# Altium PCB station_de_charge_PCB1.PcbDoc
Units mm, origin at the board's own origin, x right, y up, seen from the top; angles counter-clockwise.
Board outline 56 x 64 mm, 2 copper layers (Top Layer, Bottom Layer); 39 components, 21 nets, 89 pads, 13 vias.
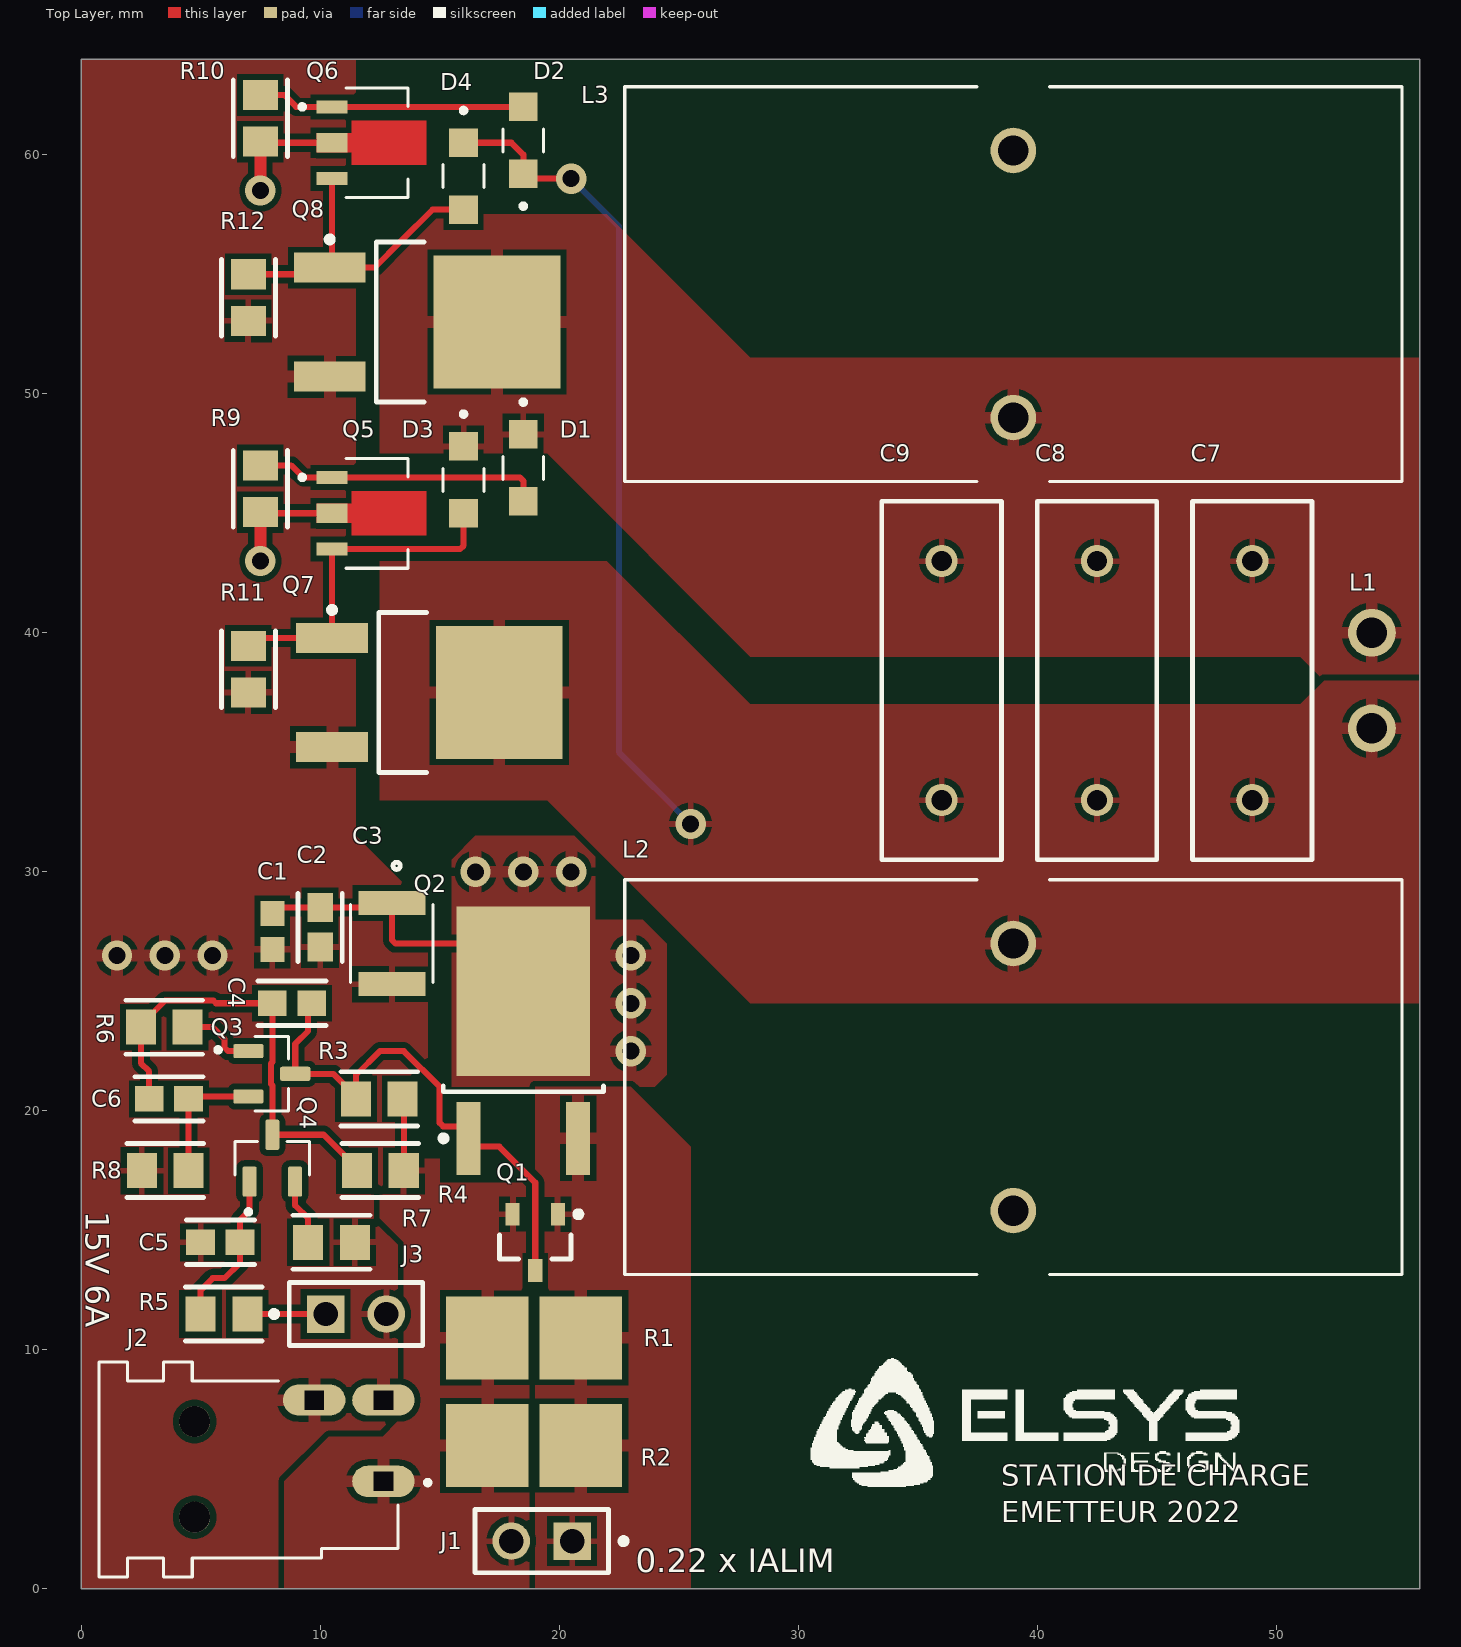
[diagram p0: Top Layer view]
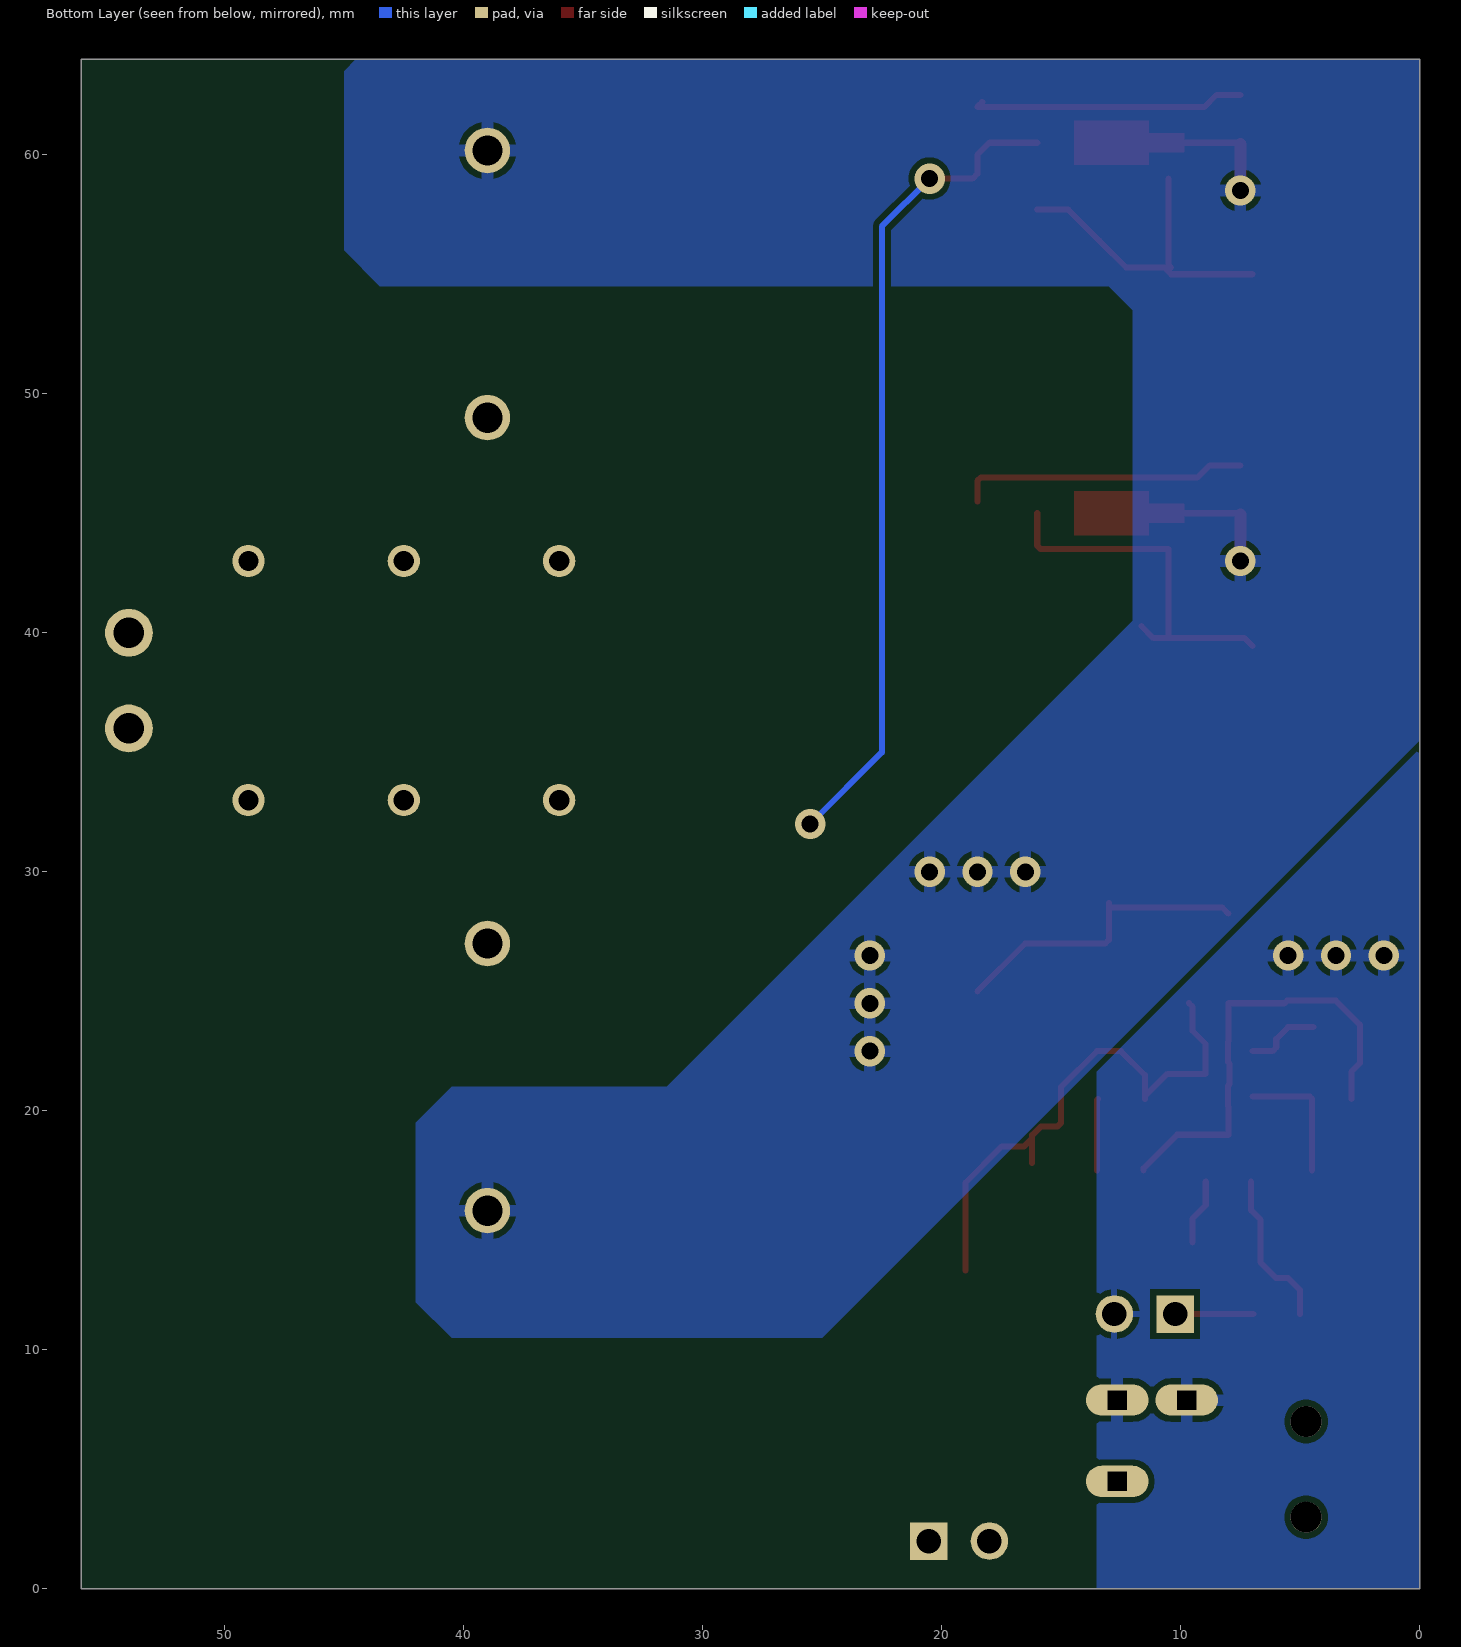
[diagram p1: Bottom Layer view, seen from below]
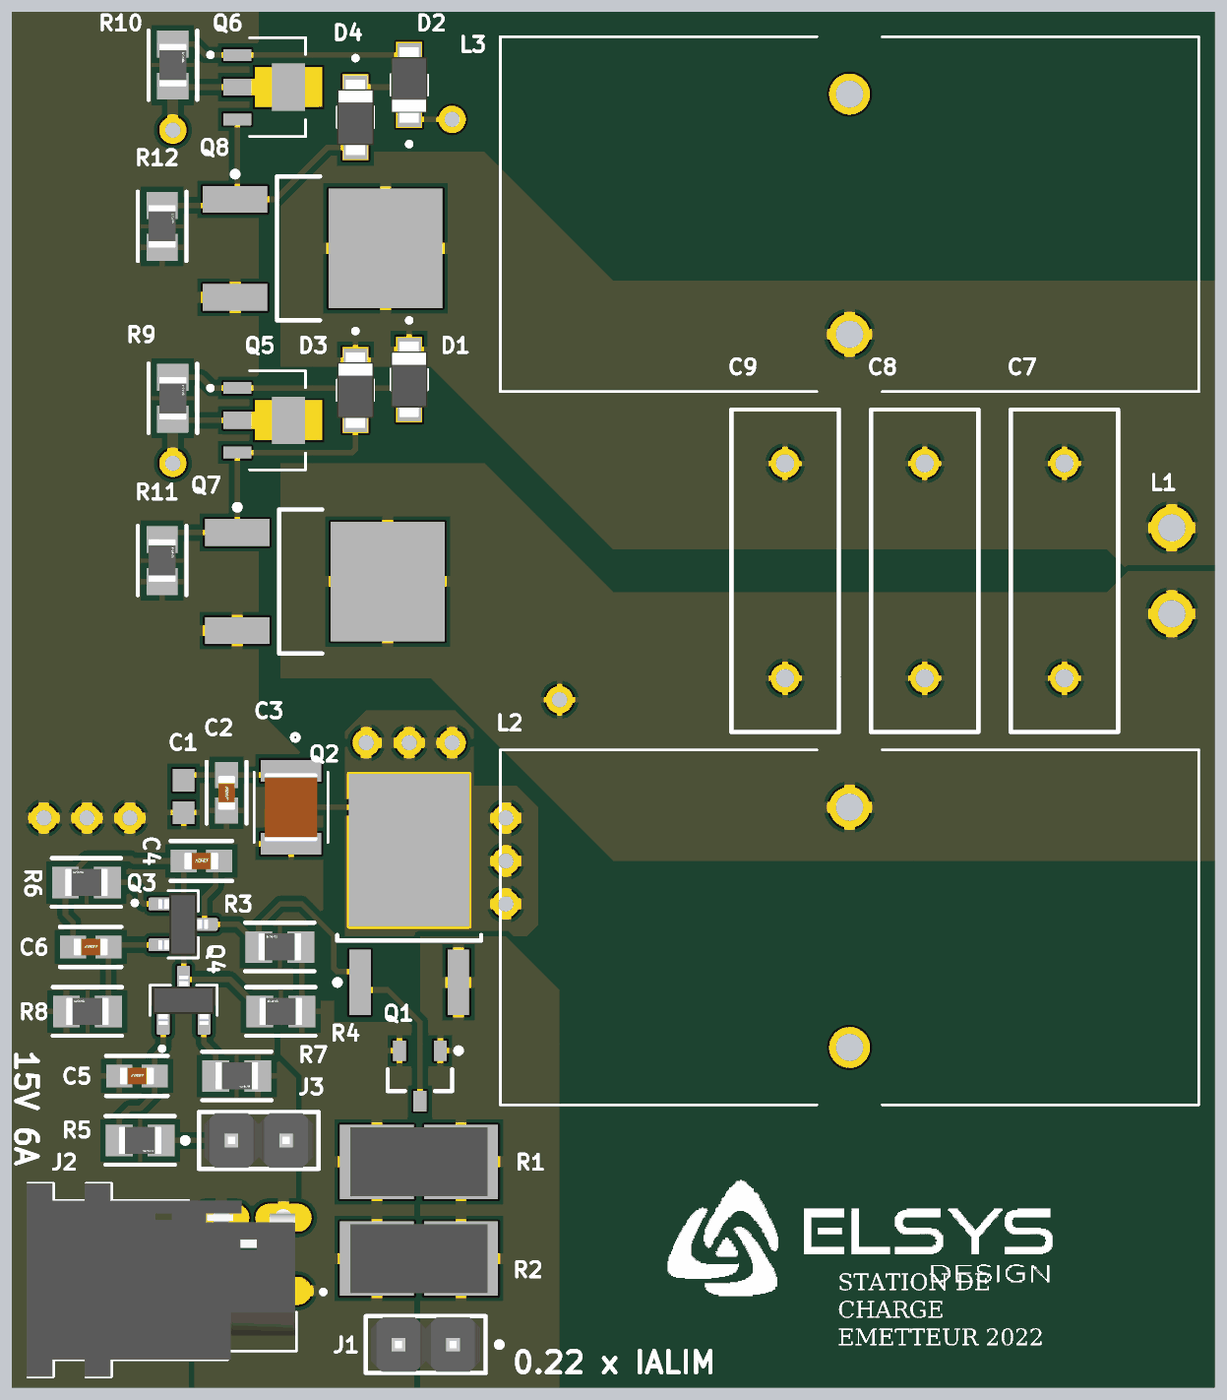
[diagram p2: 3D render of the assembled board from above, using the file's embedded part models]

## Layer stack, top to bottom
Top Solder: solder mask 0.0102, Solder Resist, Dk 3.5
Top Layer: signal copper 0.0356
Dielectric 1: dielectric 0.32, FR-4, Dk 4.8
Bottom Layer: signal copper 0.0356
Bottom Solder: solder mask 0.0102, Solder Resist, Dk 3.5

## Board outline
0,0 0,64 56,64 56,0

## Design rules (kind name [scope] priority, off if disabled: settings)
Clearance [All] p1: gap=0.254 ignorepadtopadclearanceinfootprint=FALSE except(0: Arc-Hole Track-Hole SMDPad-Hole THPad-Hole Via-Hole Fill-Hole Poly-Hole Region-Hole Text-Hole)
PolygonConnect [All] p1: connectstyle=Relief reliefconductorwidth=0.254 reliefentries=4 polygonreliefangle="90 Angle" airgapwidth=0.254
RoutingVias [All] p1: holewidth=0.711 width=1.27 viastyle="Through Hole" minholewidth=0.711 minwidth=1.27 maxholewidth=1.27 maxwidth=2
SolderMaskExpansion [All] p1: expansion=0.102 istentingtop=FALSE
Width [All] p1: maxlimit=3 minlimit=0.254 preferedwidth=0.254
30 further rules are at their usual default settings.

## Components (designator, comment, footprint, x,y, rotation, side; value= is the part's Value field where it differs from the comment)
C1 "1µF" CAPC1608X90X35NL15T15 8,27.5 r270 top
C2 "100nF" FP-C0603C104K5RAC3121-IPC_A 10,28.5 r270 top
C3 "10µf" CAPC3225X280N 13,27 r270 top
C4 "10nF" FP-C0603C104K5RAC3121-IPC_A 8,24.5 r0 top
C5 "10nF" FP-C0603C104K5RAC3121-IPC_A 5,14.5 r0 top
C6 "10nF" FP-C0603C104K5RAC3121-IPC_A 2.848,20.5 r0 top
C7 "12nF" R75PF212050H3J 49,33 r90 top
C8 "12nF" R75PF212050H3J 42.5,33 r90 top
C9 "12nF" R75PF212050H3J 36,33 r90 top
D1 "PMEG6010ER,115" TVS_PTVS13VS1UR,115 18.5,45.5 r270 top
D2 "PMEG6010ER,115" TVS_PTVS13VS1UR,115 18.5,62 r90 top
D3 "PMEG6010ER,115" TVS_PTVS13VS1UR,115 16,45 r270 top
D4 "PMEG6010ER,115" TVS_PTVS13VS1UR,115 16,57.7 r270 top
J1 "*" FP-M20-9990246-MFG 19.27,2 r180 top
J2 "PJ-042H" CUI_PJ-042H 7,5 r180 top
J3 "M20-9990246" FP-M20-9990246-MFG 11.5,11.5 r0 top
L1 "loop" loop 54,36 r180 top
L2 "2212-V-RC" IND_HCTI-220-5.8 39,27 r270 top
L3 "2212-V-RC" IND_HCTI-220-5.8 39,49 r90 top
Q1 "TMBT3906,LM" FP-TMBT3906 19,14.5 r270 top
Q2 "IPD11DP10NMATMA1" FP-IPD11DP10NM 18.5,22.95 r90 top
Q3 "BSS84AKVL" SOT95P230X110-3N 7,22.5 r0 top
Q4 "BC817K-25R" SOT95P230X110-3N 7.05,17.04 r90 top
Q5 "ZXTN19055DZTA" VREG_AP2204RA-3.3TRG1 10.5,46.5 r0 top
Q6 "ZXTN19055DZTA" VREG_AP2204RA-3.3TRG1 10.5,62 r0 top
Q7 "IRFR120TRPBF-BE3" FP-IRFR120TRPBF-BE3 14.6,37.5 r0 top
Q8 "IRFR120TRPBF-BE3" FP-IRFR120TRPBF-BE3 14.5,53 r0 top
R1 "GMR100HTCFIR220" RESC6432X55N 17,10.5 r0 top
R2 "GMR100HTCFIR220" RESC6432X55N 17,6 r0 top
R3 "ESR10EZPF4702" FP-ESR10-IPC_A 11.5,20.5 r0 top
R4 "10kOhm" FP-ESR10-IPC_A 11.546,17.5 r0 top
R5 "100Ohm" FP-ESR10-IPC_A 6.954,11.5 r180 top
R6 "1kOhm" FP-ESR10-IPC_A 2.5,23.5 r0 top
R7 "2kOhm" FP-ESR10-IPC_A 11.454,14.5 r180 top
R8 "10kOhm" FP-ESR10-IPC_A 2.546,17.5 r0 top
R9 "1kOhm" FP-ESR10-IPC_A 7.5,47 r270 top
R10 "1kOhm" FP-ESR10-IPC_A 7.5,62.5 r270 top
R11 "10kOhm" FP-ESR10-IPC_A 7,39.454 r270 top
R12 "10kOhm" FP-ESR10-IPC_A 7,55 r270 top

## Footprints (in the part's own frame and the unit in brackets; to place one, negate y for a bottom-side part, rotate by r counter-clockwise, add the part's x,y. Pads: shape width x height; smd on the part's side, far side on the other; paste and mask are expansions set on the pad)
CAPC1608X90X35NL15T15 [mm] "Chip Capacitor, 2-Leads, Body 1.60x0.81mm, IPC Medium Density"
  rect 1.05x1 smd: 1(-0.75,0) 2(0.75,0)
  body extent -0.88,-0.48 0.87,0.48, height 0.9
CAPC3225X280N [mm]
  rect 1.01x2.81 smd: 1(-1.7,0) 2(1.7,0)
  silkscreen extent -3.4,-1.72 1.63,1.72, body extent -1.6,-1.25 1.6,1.25, height 2.81
CUI_PJ-042H [mm]
  oval 2.616x1.308 hole 0.8 square: 1(-5.65,0.5) 2(-2.75,-2.9) 3(-5.65,-2.9)
  round 1.3 hole 1.3 unplated: ""(2.25,2) ""(2.25,-2)
  silkscreen extent -7.6,-4.5 6.25,4.5, body extent -6.2,-4.5 6.3,4.5, height 6.01
FP-C0603C104K5RAC3121-IPC_A [mil]
  rect 47.5x41.66 smd paste+0 mask+0: 1(0,0) 2(65.03,0)
  silkscreen extent -24,-37 89,37, body extent -43,-41 108,41, height 10
FP-ESR10-IPC_A [mm]
  rect 1.258x1.462 smd paste+0 mask+0: 1(0,0) 2(1.954,0)
  silkscreen extent -0.63,-1.13 2.58,1.13, body extent -1.13,-1.23 3.08,1.23, height 0.25
FP-IPD11DP10NM [mm] "D-PAK, 3-Pads, Body 6,21x6,73mm (max), IPC Medium Density"
  rect 3.05x1 smd: 1(-4.1,2.29) 3(-4.1,-2.29)
  rect 7.1x5.6 smd: 2(2.05,0)
  silkscreen extent -4.22,-3.35 -1.9,3.46, body extent -2.15,-3.37 4.07,3.37, height 2.41
FP-IRFR120TRPBF-BE3 [mm] "D-PAK, 3-Pads, Body 6,21x6,73mm (max), IPC Medium Density"
  rect 3x1.25 smd: 1(-4.1,2.28) 3(-4.1,-2.28)
  rect 5.3x5.55 smd: 2(2.9,0)
  silkscreen extent -4.22,-3.35 -0.15,3.58, body extent -2.15,-3.37 4.07,3.37, height 2.38
FP-M20-9990246-MFG [mm]
  rect 1.57x1.57 hole 1.02 paste-1000 mask+0: 1(-1.27,0)
  round 1.57 hole 1.02 paste-1000 mask+0: 2(1.27,0)
  silkscreen extent -3.55,-1.32 2.79,1.32, body extent -2.89,-1.42 2.89,1.42, height 0.25
FP-TMBT3906 [mm] "SOT23, 3-Leads, Body 2,90x2,40mm, Pitch 0,95mm, IPC Medium Density"
  rect 0.95x0.6 smd: 1(-1.175,0.95) 2(-1.175,-0.95) 3(1.175,0)
  silkscreen extent -1.3,-1.5 0.7,1.93, body extent -0.7,-1.5 0.7,1.5, height 1
IND_HCTI-220-5.8 [mil]
  round 75 hole 50: 1(0,0) 2(440,0)
  silkscreen extent -105,-640 545,640
loop [mm]
  round 2 hole 1.27: 1(0,0) 2(0,-4)
R75PF212050H3J [mm]
  round 1.35 hole 0.85: 1(0,0) 2(10,0)
  silkscreen extent -2.5,-2.5 12.5,2.5
RESC6432X55N [mm]
  rect 3.45x3.46 smd: 1(0,0) 2(3.912,0)
  body extent -1.24,-1.6 5.16,1.6, height 0.56
SOT95P230X110-3N [mm]
  rrect25% 1.26x0.59 smd: 1(0,0) 2(0,-1.9) 3(1.96,-0.95)
  silkscreen extent -1.37,-2.52 1.68,0.62, body extent -0.17,-2.4 2.13,0.5, height 1.1
TVS_PTVS13VS1UR,115 [mm]
  rect 1.2x1.2 smd paste-0.05: 1(-2.8,0) 2(0,0)
  silkscreen extent -4.25,-0.85 -0.92,0.85, body extent -3.15,-0.85 0.35,0.85, height 1.1
VREG_AP2204RA-3.3TRG1 [mm]
  rect 1.3x0.55 smd: 1(0,0) 3(0,-3)
  rect 1.3x0.8 smd: 2(0,-1.5)
  Top Layer region: 3.95,-2.425 0.825,-2.425 0.825,-1.9 -0.65,-1.9 -0.65,-1.1 0.825,-1.1 0.825,-0.575 3.95,-0.575
  silkscreen extent -1.35,-3.8 3.17,0.8

## Part data
C1: library part C0603C105K4RACTU, "Cap Ceramic 1uF 16V X7R 10% SMD 0603 125°C Paper T/R", Capacitance=1uF, Case Code (Imperial)=0603, Case Code (Metric)=1608, Dielectric=X7R, Dielectric Material=Ceramic, Manufacturer=KEMET, Max Operating Temperature=125°C, Min Operating Temperature=-55°C, Package Quantity=4000, Supplier Part Number 1=80-C0603C105K4R, Tolerance=10%, Voltage=16V, Case/Package=0603, Category="Ceramic Capacitors", ComponentLink1Description=https://datasheet.ciiva.com/7823/kem-c1002-x7r-smd-7823997.pdf?src-supplier=Element14, ComponentLink1URL=https://datasheet.ciiva.com/7823/kem-c1002-x7r-smd-7823997.pdf?src-supplier=Element14, ComponentLink2Description=https://datasheet.ciiva.com/22749/kem-c1002-x7r-smd-22749721.pdf?src-supplier=Element14, ComponentLink2URL=https://datasheet.ciiva.com/22749/kem-c1002-x7r-smd-22749721.pdf?src-supplier=Element14, ComponentLink3Description=https://datasheet.ciiva.com/5419/kem-c1002-x7r-smd-5419750.pdf?src-supplier=Mouser, ComponentLink3URL=https://datasheet.ciiva.com/5419/kem-c1002-x7r-smd-5419750.pdf?src-supplier=Mouser, ComponentLink4Description=https://datasheet.ciiva.com/18192/getdatasheetpartid-385479-18192732.pdf?src-supplier=Verical, ComponentLink4URL=https://datasheet.ciiva.com/18192/getdatasheetpartid-385479-18192732.pdf?src-supplier=Verical, Construction=Flat, Contact Plating=Tin,Matte, Depth=0.8mm, Dissipation Factor=3.5%, Height=0.8mm, Length=1.6mm, Manufacturer Part Number=C0603C105K4RACTU, Mount="Surface Mount,PCB", Number of Pins=2, Packaging="Tape and Reel", Pricing 1="1=0,17000, 10=0,08000, 50=0,08000, 100=0,03600, 500=0,02600, 1000=0,02000, 2000=0,01900, 4000=0,01600, 8000=0,01400, 10000=0,01400 (USD)", Radiation Hardening=No, REACH SVHC="No SVHC", RoHS=Yes, RoHS Compliant=Yes, Series=C0603C, Stock 1=3280807, Supplier 1=Mouser, Termination=SMD/SMT, Thickness=0.034inch, Voltage Rating=16V, Voltage Rating (DC)=16V, Width=0.031inch
C2: library part C0603C104K5RAC3121, "Cap Ceramic 0.1uF 50V X7R 10% Pad SMD 0603 125°C T/R", Case/Package=0603, Manufacturer=KEMET, Supplier Part Number 1=80-C603C104K5RAC3121, Category="Ceramic Capacitors", Manufacturer Part Number=C0603C104K5RAC3121, Pricing 1="1=0,13000, 10=0,09200, 50=0,09200, 100=0,04300, 1000=0,02500, 10000=0,01900 (USD)", RoHS=Yes, RoHS Compliant=Yes, Stock 1=3306727, Supplier 1=Mouser
C3: library part C3225X7R2A106K250AC, "Multilayer Ceramic Chip Capacitors, Capacitance=10μF, LxWxT: 3.2x2.5x2.5mm", Manufacturer=TDK, Supplier Part Number 1=810-C3225X7R2A106K25, Manufacturer Part Number=C3225X7R2A106K250AC, Pricing 1="1=1,50000, 10=1,19000, 50=1,19000, 100=0,89100, 1000=0,72000, 10000=0,72000 (USD)", RoHS=No, Stock 1=11549, Supplier 1=Mouser
C4 C5 C6: library part C0603C103K5RAC7013, "Cap Ceramic 0.01uF 50V X7R 10% Pad SMD 0603 125C T/R", Case/Package=0603, Dielectric=X7R, Dielectric Material=Ceramic, Manufacturer=KEMET, Max Operating Temperature=125°C, Min Operating Temperature=-55°C, Package Quantity=4000, Supplier Part Number 1=80-C0603C103K5RC7013, Tolerance=10%, Voltage Rating=50V, Capacitance=10nF, Category="Ceramic Capacitors", ComponentLink1Description=http://components.arrow.com/part/dataview/5297356S5600630N7429?src-supplier=Arrow+Electronics, ComponentLink1URL=http://components.arrow.com/part/dataview/5297356S5600630N7429?src-supplier=Arrow+Electronics, ComponentLink2Description=https://www.distrelec.biz/Web/Downloads/_t/ds/KEM_C1002_X7R_SMD_eng_tds.pdf?mime=application%2Fpdf&src-supplier=Distrelec, ComponentLink2URL=https://www.distrelec.biz/Web/Downloads/_t/ds/KEM_C1002_X7R_SMD_eng_tds.pdf?mime=application%2Fpdf&src-supplier=Distrelec, ComponentLink3Description=https://api.kemet.com/component-edge/download/datasheet/C0603C103K5RAC7013.pdf?src-supplier=Digi-Key, ComponentLink3URL=https://api.kemet.com/component-edge/download/datasheet/C0603C103K5RAC7013.pdf?src-supplier=Digi-Key, Depth=0.8mm, Height=0.8mm, Length=1.6mm, Manufacturer Part Number=C0603C103K5RAC7013, Mount="Surface Mount", Packaging="Tape and Reel", Pricing 1="1=0,13000, 10=0,05100, 50=0,05100, 100=0,04300, 500=0,03000, 1000=0,02500, 2000=0,02300, 4000=0,02000, 10000=0,02000 (USD)", Radiation Hardening=No, RoHS=Yes, Stock 1=21368, Supplier 1=Mouser, Thickness=0.035inch, Voltage Rating (DC)=50V, Width=0.031inch
C7 C8 C9: library part R75PF212050H3J, "Cap Film 0.012uF 630V PP 5% Molded Solder Pin 10mm 125°C Bulk", Manufacturer=KEMET, Supplier Part Number 1=80-R75PF212050H3J, Category="Film Capacitors", Manufacturer Part Number=R75PF212050H3J, Pricing 1="1=0,55000, 10=0,39100, 50=0,29600, 100=0,25700, 1000=0,16200, 10000=0,15200 (USD)", RoHS=Yes, Stock 1=3328, Supplier 1=Mouser
D1 D2 D3 D4: "DIODE SCHOTTKY 60V 1A SOD123W", Manufacturer=Nexperia, Supplier Part Number 1=771-PMEG6010ER115, Category="Rectifier Diodes", ComponentLink1Description=http://www.farnell.com/datasheets/1383349.pdf?src-supplier=Farnell, ComponentLink1URL=http://www.farnell.com/datasheets/1383349.pdf?src-supplier=Farnell, ComponentLink2Description=https://assets.nexperia.com/documents/data-sheet/PMEG6010ER.pdf?src-supplier=Digi-Key, ComponentLink2URL=https://assets.nexperia.com/documents/data-sheet/PMEG6010ER.pdf?src-supplier=Digi-Key, Manufacturer Part Number=PMEG6010ER,115, Pricing 1="1=0,44000, 10=0,33300, 50=0,33300, 100=0,20700, 500=0,14200, 1000=0,10900, 3000=0,09200, 9000=0,08400, 10000=0,08400, 24000=0,07800, 45000=0,07600 (USD)", RoHS=Yes, RoHS Compliant=Yes, Stock 1=80739, Supplier 1=Mouser
J1: "2.54mm (0.1\") Pitch SIL Vertical PC Tail Pin Header, 6.1mm mating pin height, tin, 2 contacts", Case/Package=SIL, Color=Black, Contact Resistance=30mR, Current Rating=3A, Insulation Resistance=10GR, Manufacturer=Harwin, Manufacturer Part Number=M20-9990246, Max Operating Temperature=105°C, Min Operating Temperature=-40°C, Package Quantity=1000, Supplier Part Number 1=855-M20-9990246, Voltage Rating (AC)=750V, Category="Headers and Wire Housings", ComponentLink1Description=https://datasheet.ciiva.com/8046/315376-8046930.pdf?src-supplier=Element14, ComponentLink1URL=https://datasheet.ciiva.com/8046/315376-8046930.pdf?src-supplier=Element14, ComponentLink2Description=https://datasheet.ciiva.com/11745/0900766b81034e61-11745755.pdf?src-supplier=RSComponents, ComponentLink2URL=https://datasheet.ciiva.com/11745/0900766b81034e61-11745755.pdf?src-supplier=RSComponents, ComponentLink3Description=https://datasheet.ciiva.com/22660/1830818-22660571.pdf?src-supplier=Element14, ComponentLink3URL=https://datasheet.ciiva.com/22660/1830818-22660571.pdf?src-supplier=Element14, ComponentLink4Description=https://datasheet.ciiva.com/6833/m20-999-6833368.pdf?src-supplier=Digi-Key, ComponentLink4URL=https://datasheet.ciiva.com/6833/m20-999-6833368.pdf?src-supplier=Digi-Key, ComponentLink5Description=https://datasheet.ciiva.com/26852/getdatasheetpartid-384170-26852203.pdf?src-supplier=Verical, ComponentLink5URL=https://datasheet.ciiva.com/26852/getdatasheetpartid-384170-26852203.pdf?src-supplier=Verical, Connector Type="Male Pin", Contact Material=Brass,Bronze, Contact Mating Length=0.24inch, Contact Plating=Tin, Depth=2.54mm, Gender=Male, Housing Color=Black, Housing Material=Nylon, Length=5.08mm, Max Current Rating=3A, Mount="Through Hole", Number of Contacts=2, Number of Positions=2, Number of Rows=1, Orientation=Straight, Packaging=Bulk, Pitch=2.54mm, Pricing 1="1=0,17000, 10=0,08400, 50=0,08400, 100=0,07000, 500=0,06300, 1000=0,05400, 2000=0,04600, 10000=0,04500, 25000=0,03700, 50000=0,03500 (USD)", Radiation Hardening=No, REACH SVHC="No SVHC", RoHS=Yes, Stock 1=121083, Supplier 1=Mouser, Termination=Solder
J2: "1.65 x 5.15 mm, 5.0 A, Horizontal, Through Hole, Kinked Pins, Dc Power Jack Connector", Manufacturer="CUI Devices", Supplier Part Number 1=490-PJ-042H, Category="Power Connectors", Manufacturer Part Number=PJ-042H, Pricing 1="1=0,75000, 10=0,59500, 50=0,59500, 100=0,51800, 1000=0,41400, 10000=0,37000 (USD)", RoHS=Yes, Stock 1=5617, Supplier 1=Mouser
J3: "2.54mm (0.1\") Pitch SIL Vertical PC Tail Pin Header, 6.1mm mating pin height, tin, 2 contacts", Case/Package=SIL, Color=Black, Contact Resistance=30mR, Current Rating=3A, Insulation Resistance=10GR, Manufacturer=Harwin, Max Operating Temperature=105°C, Min Operating Temperature=-40°C, Package Quantity=1000, Supplier Part Number 1=855-M20-9990246, Voltage Rating (AC)=750V, Category="Headers and Wire Housings", ComponentLink1Description=https://datasheet.ciiva.com/8046/315376-8046930.pdf?src-supplier=Element14, ComponentLink1URL=https://datasheet.ciiva.com/8046/315376-8046930.pdf?src-supplier=Element14, ComponentLink2Description=https://datasheet.ciiva.com/11745/0900766b81034e61-11745755.pdf?src-supplier=RSComponents, ComponentLink2URL=https://datasheet.ciiva.com/11745/0900766b81034e61-11745755.pdf?src-supplier=RSComponents, ComponentLink3Description=https://datasheet.ciiva.com/22660/1830818-22660571.pdf?src-supplier=Element14, ComponentLink3URL=https://datasheet.ciiva.com/22660/1830818-22660571.pdf?src-supplier=Element14, ComponentLink4Description=https://datasheet.ciiva.com/6833/m20-999-6833368.pdf?src-supplier=Digi-Key, ComponentLink4URL=https://datasheet.ciiva.com/6833/m20-999-6833368.pdf?src-supplier=Digi-Key, ComponentLink5Description=https://datasheet.ciiva.com/26852/getdatasheetpartid-384170-26852203.pdf?src-supplier=Verical, ComponentLink5URL=https://datasheet.ciiva.com/26852/getdatasheetpartid-384170-26852203.pdf?src-supplier=Verical, Connector Type="Male Pin", Contact Material=Brass,Bronze, Contact Mating Length=0.24inch, Contact Plating=Tin, Depth=2.54mm, Gender=Male, Housing Color=Black, Housing Material=Nylon, Length=5.08mm, Manufacturer Part Number=M20-9990246, Max Current Rating=3A, Mount="Through Hole", Number of Contacts=2, Number of Positions=2, Number of Rows=1, Orientation=Straight, Packaging=Bulk, Pitch=2.54mm, Pricing 1="1=0,17000, 10=0,08400, 50=0,08400, 100=0,07000, 500=0,06300, 1000=0,05400, 2000=0,04600, 10000=0,04500, 25000=0,03700, 50000=0,03500 (USD)", Radiation Hardening=No, REACH SVHC="No SVHC", RoHS=Yes, Stock 1=121083, Supplier 1=Mouser, Termination=Solder
L2 L3: "Inductor High Current Toroid 100uH/64uH 15% 1KHz 4.4A 56mOhm DCR RDL", Case/Package=Radial, Current Rating=4.4A, DC Resistance (DCR)=56mR, Inductance=100uH, Inductance Tolerance=15%, Manufacturer="Bourns JW Miller", Max Operating Temperature=105°C, Min Operating Temperature=-55°C, Package Quantity=77, Supplier Part Number 1=542-2212-V-RC, Test Frequency=1kHz, Category="Fixed Inductors", ComponentLink1Description=https://datasheet.ciiva.com/11798/0900766b80fa5688-11798051.pdf?src-supplier=RSComponents, ComponentLink1URL=https://datasheet.ciiva.com/11798/0900766b80fa5688-11798051.pdf?src-supplier=RSComponents, ComponentLink2Description=https://datasheet.ciiva.com/6690/2200-series-6690646.pdf?src-supplier=Digi-Key, ComponentLink2URL=https://datasheet.ciiva.com/6690/2200-series-6690646.pdf?src-supplier=Digi-Key, ComponentLink3Description=https://datasheet.ciiva.com/28654/2200-series-28654982.pdf?src-supplier=Element14, ComponentLink3URL=https://datasheet.ciiva.com/28654/2200-series-28654982.pdf?src-supplier=Element14, ComponentLink4Description=https://datasheet.ciiva.com/3076/2200-series-3076522.pdf?src-supplier=Avnet, ComponentLink4URL=https://datasheet.ciiva.com/3076/2200-series-3076522.pdf?src-supplier=Avnet, Contact Plating=Tin, Core Material=Ferrite, DC Current=4.4A, Depth=13.97mm, Diameter=0.95inch, Height - Seated (Max)=0.55inch, Lead Diameter=0.86mm, Lead Free="Lead Free", Lead Pitch=11.176mm, Lead/Base Style=Radial, Manufacturer Part Number=2212-V-RC, Max DC Current=4.4A, Military Standard=Not, Mount="Through Hole,Radial", Number of Pins=2, Packaging=Bulk, Pricing 1="1=4,88000, 10=4,48000, 50=3,72000, 100=2,93000, 1000=2,93000, 10000=2,93000 (USD)", Radiation Hardening=No, REACH SVHC="No SVHC", RMS Current (Irms)=4.4A, RoHS=Yes, RoHS Compliant=Yes, Series=2200, Shielding=Shielded, Stock 1=1501, Supplier 1=Mouser, Termination=Radial, Tolerance=15%, Width=0.55inch
Q1: "TRANSPNP50V0.15ASOT23-3", Case/Package=TO-236-3, Collector Emitter Breakdown Voltage=50V, Collector Emitter Voltage (VCEO)=400mV, Manufacturer=Toshiba, Max Collector Current=150mA, Max Power Dissipation=320mW, Supplier Part Number 1=757-TMBT3906LM, Transition Frequency=250MHz, Category=BJTs, ComponentLink1Description=http://www.mouser.com/ds/2/408/TMBT3906_datasheet_en_20150108-736658.pdf?src-supplier=Mouser, ComponentLink1URL=http://www.mouser.com/ds/2/408/TMBT3906_datasheet_en_20150108-736658.pdf?src-supplier=Mouser, ComponentLink2Description=https://toshiba.semicon-storage.com/info/docget.jsp?did=29746&prodName=TMBT3906&src-supplier=Digi-Key, ComponentLink2URL=https://toshiba.semicon-storage.com/info/docget.jsp?did=29746&prodName=TMBT3906&src-supplier=Digi-Key, Manufacturer Part Number=TMBT3906,LM, Max Breakdown Voltage=50V, Mount="Surface Mount", Packaging="Tape and Reel", Pricing 1="1=0,18000, 10=0,16800, 50=0,16800, 100=0,09100, 500=0,05600, 1000=0,03900, 3000=0,02900, 9000=0,02500, 10000=0,02500, 24000=0,02200, 45000=0,01900 (USD)", RoHS=Yes, Stock 1=7851, Supplier 1=Mouser
Q2: "Mosfet, P-ch, 100V, TO-252-3 Rohs Compliant: Yes", Manufacturer=Infineon, Supplier Part Number 1=726-IPD11DP10NMATMA1, Category=Uncategorized, Manufacturer Part Number=IPD11DP10NMATMA1, Pricing 1="1=2,01000, 10=1,81000, 50=1,81000, 100=1,46000, 1000=1,14000, 10000=1,13000 (USD)", RoHS=No, Stock 1=2351, Supplier 1=Mouser
Q3: "BSS84AKV/SOT666/SOT6", Manufacturer=Nexperia, Supplier Part Number 1=771-BSS84AKVL, Manufacturer Part Number=BSS84AKVL, Pricing 1="1=0,24000, 10=0,20200, 50=0,20200, 100=0,10800, 500=0,07100, 1000=0,04800, 2500=0,03800, 10000=0,03100 (USD)", RoHS=Yes, RoHS Compliant=Yes, Stock 1=4944, Supplier 1=Mouser
Q4: "BC817K-25H/SOT23/TO-236AB", Manufacturer=Nexperia, Supplier Part Number 1=771-BC817K-25R, Category=BJTs, Manufacturer Part Number=BC817K-25R, Pricing 1="1=0,24000, 10=0,19900, 50=0,19900, 100=0,10600, 1000=0,04800, 10000=0,03100 (USD)", RoHS=No, RoHS Compliant=Yes, Stock 1=50401, Supplier 1=Mouser
Q5 Q6: "TRANS NPN 55V 6A SOT89", Case/Package=SOT-89, Collector Base Voltage (VCBO)=150V, Collector Emitter Breakdown Voltage=55V, Collector Emitter Saturation Voltage=250mV, Current Rating=6A, Emitter Base Voltage (VEBO)=7V, Frequency=200MHz, Manufacturer="Diodes Zetex", Max Operating Temperature=150°C, Max Power Dissipation=2.1W, Min Operating Temperature=-55°C, Package Quantity=1000, Supplier Part Number 1=522-ZXTN19055DZTA, Category=BJTs, Collector Emitter Voltage (VCEO)=55V, Collector-emitter Voltage-Max=250mV, ComponentLink1Description=https://datasheet.ciiva.com/11207/zxtn19055dz-11207305.pdf?src-supplier=Avnet, ComponentLink1URL=https://datasheet.ciiva.com/11207/zxtn19055dz-11207305.pdf?src-supplier=Avnet, ComponentLink2Description=https://datasheet.ciiva.com/6359/zxtn19055dz-6359881.pdf?src-supplier=Digi-Key, ComponentLink2URL=https://datasheet.ciiva.com/6359/zxtn19055dz-6359881.pdf?src-supplier=Digi-Key, ComponentLink3Description=https://datasheet.ciiva.com/6359/zxtn19055dz-6359879.pdf?src-supplier=Digi-Key, ComponentLink3URL=https://datasheet.ciiva.com/6359/zxtn19055dz-6359879.pdf?src-supplier=Digi-Key, Element Configuration=Single, Gain Bandwidth Product=200MHz, Height=1.6mm, Lead Free="Lead Free", Length=4.6mm, Manufacturer Part Number=ZXTN19055DZTA, Max Breakdown Voltage=55V, Max Collector Current=6A, Max Frequency=200MHz, Mount="Surface Mount", Number of Elements=1, Number of Pins=4, Packaging="Tape and Reel", Polarity=NPN, Power Dissipation=2.1W, Pricing 1="1=0,73000, 10=0,64800, 50=0,64800, 100=0,49700, 1000=0,31300, 10000=0,26500 (USD)", Radiation Hardening=No, REACH SVHC="No SVHC", RoHS=Yes, RoHS Compliant=Yes, Series=-, Stock 1=6672, Supplier 1=Mouser, Transition Frequency=200MHz, Voltage Rating (DC)=55V, Weight=0.001834oz, Width=2.6mm
Q7 Q8: Manufacturer="Vishay Siliconix", Supplier Part Number 1=78-IRFR120TRPBF-BE3, Manufacturer Part Number=IRFR120TRPBF-BE3, Pricing 1="1=1,41000, 10=1,27000, 50=1,27000, 100=0,98800, 500=0,81600, 1000=0,64400, 2000=0,60400, 10000=0,60400 (USD)", RoHS=Yes, Stock 1=3186, Supplier 1=Mouser
R1 R2: "Res Current Sense Metal Plate 2512 0.1 Ohm 1% 3W ±20ppm/°C Molded Emboss T/R", Case Code (Imperial)=2512, Case Code (Metric)=6432, Manufacturer=Rohm, Max Operating Temperature=170°C, Max Power Dissipation=3W, Min Operating Temperature=-55°C, Resistance=220mR, Resistor Type="Metal Element", Supplier Part Number 1=755-GMR100HTCFIR220, Temperature Coefficient=20ppm/°C, Tolerance=1%, Case/Package=2512, Category="Chip SMD Resistors", ComponentLink1Description=http://www.farnell.com/datasheets/2372626.pdf?src-supplier=Farnell, ComponentLink1URL=http://www.farnell.com/datasheets/2372626.pdf?src-supplier=Farnell, ComponentLink2Description=http://rohmfs.rohm.com/en/products/databook/datasheet/passive/resistor/chip_resistor/gmr-e.pdf?src-supplier=Digi-Key, ComponentLink2URL=http://rohmfs.rohm.com/en/products/databook/datasheet/passive/resistor/chip_resistor/gmr-e.pdf?src-supplier=Digi-Key, ComponentLink3Description=http://www.farnell.com/datasheets/2372626.pdf?src-supplier=Newark, ComponentLink3URL=http://www.farnell.com/datasheets/2372626.pdf?src-supplier=Newark, Features="Automotive AEC-Q200", Manufacturer Part Number=GMR100HTCFIR220, Number of Terminations=2, Packaging="Tape and Reel", Pricing 1="1=1,30000, 10=1,16000, 50=1,05000, 100=1,05000, 1000=1,05000, 10000=1,05000 (USD)", RoHS=No, Stock 1=10040, Supplier 1=Mouser
R3: "Res Thick Film 0805 47K Ohm 1% 0.4W ±100ppm/C Pad SMD Automotive T/R", Case Code (Imperial)=0805, Case Code (Metric)=2012, Manufacturer=Rohm, Max Operating Temperature=155°C, Max Power Dissipation=400mW, Min Operating Temperature=-55°C, Package Quantity=1, Resistance=47kR, Resistor Type="Thick Film", Supplier Part Number 1=755-ESR10EZPF4702, Temperature Coefficient=100ppm/°C, Tolerance=1%, Case/Package=0805, Category="Chip SMD Resistors", ComponentLink1Description=https://datasheet.ciiva.com/2469/esr-2469981.pdf?src-supplier=Digi-Key, ComponentLink1URL=https://datasheet.ciiva.com/2469/esr-2469981.pdf?src-supplier=Digi-Key, ComponentLink2Description=https://datasheet.ciiva.com/2469/esr-2469979.pdf?src-supplier=Digi-Key, ComponentLink2URL=https://datasheet.ciiva.com/2469/esr-2469979.pdf?src-supplier=Digi-Key, ComponentLink3Description=https://datasheet.ciiva.com/2469/esr-2469980.pdf?src-supplier=Digi-Key, ComponentLink3URL=https://datasheet.ciiva.com/2469/esr-2469980.pdf?src-supplier=Digi-Key, Features="Automotive AEC-Q200", Height=0.026inch, Length=0.079inch, Manufacturer Part Number=ESR10EZPF4702, Number of Terminations=2, Packaging="Tape and Reel", Pricing 1="1=0,18000, 10=0,15300, 50=0,15300, 100=0,06000, 1000=0,02600, 2500=0,02300, 5000=0,02000, 10000=0,02000 (USD)", RoHS=Yes, RoHS Compliant=Yes, Series=ESR, Stock 1=31570, Supplier 1=Mouser, Width=0.049inch
R4 R8 R11 R12: library part ESR10EZPF1002, "Res Thick Film 0805 10K Ohm 1% 0.4W ±100ppm/C Pad SMD Automotive T/R", Case Code (Imperial)=0805, Case Code (Metric)=2012, Manufacturer=Rohm, Max Operating Temperature=155°C, Max Power Dissipation=400mW, Min Operating Temperature=-55°C, Package Quantity=1, Resistance=10kR, Resistor Type="Thick Film", Supplier Part Number 1=755-ESR10EZPF1002, Temperature Coefficient=100ppm/°C, Tolerance=1%, Case/Package=0805, Category="Chip SMD Resistors", ComponentLink1Description=https://datasheet.ciiva.com/2469/esr-2469862.pdf?src-supplier=Digi-Key, ComponentLink1URL=https://datasheet.ciiva.com/2469/esr-2469862.pdf?src-supplier=Digi-Key, ComponentLink2Description=https://datasheet.ciiva.com/2469/esr-2469863.pdf?src-supplier=Digi-Key, ComponentLink2URL=https://datasheet.ciiva.com/2469/esr-2469863.pdf?src-supplier=Digi-Key, ComponentLink3Description=https://datasheet.ciiva.com/2469/esr-2469864.pdf?src-supplier=Digi-Key, ComponentLink3URL=https://datasheet.ciiva.com/2469/esr-2469864.pdf?src-supplier=Digi-Key, Features="Automotive AEC-Q200", Height=0.026inch, Length=0.079inch, Manufacturer Part Number=ESR10EZPF1002, Number of Terminations=2, Packaging="Tape and Reel", Pricing 1="1=0,18000, 10=0,15300, 50=0,15300, 100=0,06000, 1000=0,02600, 2500=0,02300, 5000=0,02000, 10000=0,02000 (USD)", RoHS=Yes, RoHS Compliant=Yes, Series=ESR, Stock 1=82018, Supplier 1=Mouser, Width=0.049inch
R5: library part ESR10EZPF1000, "Res Thick Film 0805 100 Ohm 1% 2/5W ±100ppm/°C Molded SMD Paper T/R", Case Code (Imperial)=0805, Case Code (Metric)=2012, Manufacturer=Rohm, Max Operating Temperature=155°C, Max Power Dissipation=400mW, Min Operating Temperature=-55°C, Resistance=100R, Resistor Type="Thick Film", Supplier Part Number 1=755-ESR10EZPF1000, Temperature Coefficient=100ppm/°C, Tolerance=1%, Case/Package=0805, Category="Chip SMD Resistors", ComponentLink1Description=http://www.farnell.com/datasheets/2611941.pdf?src-supplier=Farnell, ComponentLink1URL=http://www.farnell.com/datasheets/2611941.pdf?src-supplier=Farnell, ComponentLink2Description=https://www.rohm.com/datasheet/ESR01MZPF/esr-e?src-supplier=Digi-Key, ComponentLink2URL=https://www.rohm.com/datasheet/ESR01MZPF/esr-e?src-supplier=Digi-Key, ComponentLink3Description=http://www.farnell.com/datasheets/2611941.pdf?src-supplier=Newark, ComponentLink3URL=http://www.farnell.com/datasheets/2611941.pdf?src-supplier=Newark, ComponentLink4Description=http://rohmfs.rohm.com/en/products/databook/datasheet/passive/resistor/chip_resistor/esr.pdf?src-supplier=Avnet, ComponentLink4URL=http://rohmfs.rohm.com/en/products/databook/datasheet/passive/resistor/chip_resistor/esr.pdf?src-supplier=Avnet, Features="Automotive AEC-Q200", Manufacturer Part Number=ESR10EZPF1000, Number of Terminations=2, Packaging="Tape and Reel", Pricing 1="1=0,18000, 10=0,15300, 50=0,15300, 100=0,06000, 1000=0,02600, 10000=0,02000 (USD)", RoHS=Yes, RoHS Compliant=Yes, Series=ESR, Stock 1=17116, Supplier 1=Mouser
R6 R9 R10: library part ESR10EZPF1001, "Res Thick Film 0805 1K Ohm 1% 0.4W ±100ppm/C Epoxy Resin Pad SMD Automotive T/R", Case Code (Imperial)=0805, Case Code (Metric)=2012, Manufacturer=Rohm, Max Operating Temperature=155°C, Max Power Dissipation=400mW, Min Operating Temperature=-55°C, Package Quantity=1, Resistance=1kR, Resistor Type="Thick Film", Supplier Part Number 1=755-ESR10EZPF1001, Temperature Coefficient=100ppm/°C, Tolerance=1%, Case/Package=0805, Category="Chip SMD Resistors", ComponentLink1Description=https://datasheet.ciiva.com/2470/esr-2470004.pdf?src-supplier=Digi-Key, ComponentLink1URL=https://datasheet.ciiva.com/2470/esr-2470004.pdf?src-supplier=Digi-Key, ComponentLink2Description=https://datasheet.ciiva.com/2470/esr-2470005.pdf?src-supplier=Digi-Key, ComponentLink2URL=https://datasheet.ciiva.com/2470/esr-2470005.pdf?src-supplier=Digi-Key, ComponentLink3Description=https://datasheet.ciiva.com/2470/esr-2470003.pdf?src-supplier=Digi-Key, ComponentLink3URL=https://datasheet.ciiva.com/2470/esr-2470003.pdf?src-supplier=Digi-Key, Features="Automotive AEC-Q200", Height=0.026inch, Lead Free="Lead Free", Length=0.079inch, Manufacturer Part Number=ESR10EZPF1001, Number of Terminations=2, Packaging="Tape and Reel", Power Rating=400mW, Pricing 1="1=0,18000, 10=0,15300, 50=0,15300, 100=0,06000, 1000=0,02600, 10000=0,02000 (USD)", RoHS=Yes, RoHS Compliant=Yes, Series=ESR, Size Code=0805, Stock 1=27313, Supplier 1=Mouser, Width=0.049inch
R7: library part ESR10EZPF2001, "Res Thick Film 0805 2K Ohm 1% 2/5W ±100ppm/°C Molded SMD Paper T/R", Case Code (Imperial)=0805, Case Code (Metric)=2012, Manufacturer=Rohm, Max Power Dissipation=400mW, Package Quantity=5000, Resistance=2kR, Resistor Type="Thick Film", Supplier Part Number 1=755-ESR10EZPF2001, Temperature Coefficient=100ppm/°C, Tolerance=1%, Case/Package=0805, Category="Chip SMD Resistors", ComponentLink1Description=http://www1.futureelectronics.com/doc/ROHM%20SEMICONDUCTOR/ESR10EZPD.pdf?src-supplier=Future+Electronics, ComponentLink1URL=http://www1.futureelectronics.com/doc/ROHM%20SEMICONDUCTOR/ESR10EZPD.pdf?src-supplier=Future+Electronics, ComponentLink2Description=https://www.rohm.com/datasheet/ESR01MZPF/esr-e?src-supplier=Digi-Key, ComponentLink2URL=https://www.rohm.com/datasheet/ESR01MZPF/esr-e?src-supplier=Digi-Key, ComponentLink3Description=http://www.rohm.com/web/global/datasheet/ESR01MZPF/esr-e?src-supplier=Digi-Key, ComponentLink3URL=http://www.rohm.com/web/global/datasheet/ESR01MZPF/esr-e?src-supplier=Digi-Key, ComponentLink4Description=http://rohmfs.rohm.com/en/products/databook/datasheet/passive/resistor/chip_resistor/esr.pdf?src-supplier=Avnet, ComponentLink4URL=http://rohmfs.rohm.com/en/products/databook/datasheet/passive/resistor/chip_resistor/esr.pdf?src-supplier=Avnet, Height=0.026inch, Lead Free="Lead Free", Length=0.079inch, Manufacturer Part Number=ESR10EZPF2001, Number of Terminations=2, Packaging="Tape and Reel", Power Rating=400mW, Pricing 1="1=0,18000, 10=0,15300, 50=0,15300, 100=0,06000, 1000=0,02600, 10000=0,02000 (USD)", RoHS=Yes, RoHS Compliant=Yes, Series=ESR10, Size Code=0805, Stock 1=82201, Supplier 1=Mouser, Width=0.049inch

## Via types
v1: diameter 1.27, hole 0.711, Top Layer to Bottom Layer, 13 vias

## Nets (pads, with @x,y where several pads share a name; then routed paths per layer and width w, separated by ;. In a path a pad name is that pad's centre, name@x,y a point inside that pad or via, vN(x,y) a via of type N, cw(c..) or ccw(c..) an arc to the next point about the centre after c; other vN are vias at no path point)
+12V: C1.1 C2.1 C3.1 L2.2 L3.2 Q2.2 Q5.2 Q6.2 R9.2 R10.2 | length 23
  Top Layer w0.254: R9.2@7.5,44.954 7.546,45 Q5.2 ; R10.2@7.5,60.454 7.546,60.5 Q6.2 ; C1.1 8.25,28.5 C2.1 C3.1@13,28.5 ; C3.1 C3.1@13,28.5 ; Q2.2 16.5,27 13.149,27 13,27.149 C3.1@13,28.5
  Top Layer w0.508: v1(7.5,43) R9.2@7.5,44.954 ; v1(7.5,58.5) R10.2@7.5,60.454
  other v1: 23,22.5 23,24.5 23,26.5 16.5,30 18.5,30 20.5,30
GND: C1.2 C2.2 C3.2 C5.1 J2.2 J2.3 J3.2 Q7.3 Q8.3 R7.1 R8.1 R11.2 R12.2
  other v1: 1.5,26.5 3.5,26.5 5.5,26.5
NetC4_1: C4.1 C6.1 Q4.3 R4.1 R6.1 | length 19
  Top Layer w0.254: C6.1 2.848,21.652 2.5,22 2.5,23.602 3.51,24.612 5.539,24.612 5.651,24.5 C4.1 8,22.921 8.011,22.91 8.011,22.043 7.949,21.981 7.949,21.115 8.011,21.053 8.011,20.19 8,20.179 Q4.3 10.148,19 11.546,17.602 R4.1
NetC4_2: C4.2 Q1.3 Q2.1 Q3.3 R3.1 | length 23
  Top Layer w0.254: C4.2 9.5,24.348 9.5,23.34 8.96,22.8 Q3.3 10.552,21.55 R3.1@11.5,20.602 ; R3.1 R3.1@11.5,20.602 ; Q2.1@16.21,17.825 Q2.1 ; Q1.3 19,17 17.5,18.5 16.56,18.5 Q2.1 ; R3.1@11.5,20.602 11.5,21.5 12.5,22.5 13.5,22.5 15,21 15,19.5 15.149,19.351 15.837,19.351 16.21,18.978 Q2.1
NetC5_2: C5.2 Q4.1 R5.2 | length 6.7
  Top Layer w0.254: R5.2 5,12.5 5.5,13 6,13 6.652,13.652 C5.2 6.652,15.441 7.05,15.84 Q4.1
NetC6_2: C6.2 Q3.2 R8.2 | length 5.5
  Top Layer w0.254: R8.2 C6.2 4.6,20.6 Q3.2
NetC7_1: C7.1 C8.1 C9.1 D2.1 D4.1 L1.1 L2.1 Q7.2 | length 34.7
  Top Layer w0.254: D4.1 18,60.5 18.5,60 D2.1 18.7,59 v1(20.5,59)
  Bottom Layer w0.254: v1(20.5,59) 22.5,57 22.5,35 v1(25.5,32)
NetC7_2: C7.2 C8.2 C9.2 D1.1 D3.1 L1.2 L3.1 Q8.2
NetC10_1: 
NetC11_1: 
NetC11_2: 
NetD1_2: D1.2 Q5.1 R9.1 | length 12.1
  Top Layer w0.254: R9.1 8.791,47 9.291,46.5 Q5.1 18.351,46.5 18.5,46.351 D1.2
NetD2_2: D2.2 Q6.1 R10.1 | length 11.5
  Top Layer w0.254: R10.1 8.5,62.5 9,62 Q6.1 D2.2 D2.2@18.3,62.2
NetD3_2: D3.2 Q5.3 Q7.1 R11.1 | length 15.6
  Top Layer w0.254: R11.1 7.326,39.78 Q7.1 ; Q7.1@11.637,40.278 11.139,39.78 Q7.1 ; D3.2 16,43.649 15.851,43.5 Q5.3 Q7.1
NetD4_2: D4.2 Q6.3 Q8.1 R12.1 | length 14.2
  Top Layer w0.254: R12.1 10.4,55 Q8.1@10.68,55.28 ; Q6.3 10.5,55.38 Q8.1 10.5,55.28 Q8.1@10.68,55.28 ; D4.2 14.7,57.7 13.399,56.399 12.28,55.28 Q8.1@10.68,55.28
NetD5_1: 
NetJ1_1: J1.1 Q1.1 Q2.3 R1.2 R2.2
NetJ1_2: J1.2 J2.1 Q1.2 R1.1 R2.1 R3.2 R4.2 | length 3
  Top Layer w0.254: R3.2 13.5,20.454 R4.2
NetJ3_1: J3.1 R5.1 | length 3.3
  Top Layer w0.254: R5.1 J3.1
NetQ3_1: Q3.1 R6.2 | length 3.2
  Top Layer w0.254: R6.2 5.5,23.5 6,23 6,22.649 6.149,22.5 Q3.1
NetQ4_2: Q4.2 R7.2 | length 2.8
  Top Layer w0.254: Q4.2 8.95,16.05 9.5,15.5 R7.2
pads on no net: J2.

## Polygon pours and split planes (outlines as drawn)
GND on Top Layer "GND_L01_P015" (solid, pour order 15): 0,64 11.5,64 11.5,31.5 14.5,28.5 14.5,18.117 12.874,16.491 12.5,16.491 12.5,15.5 13.5,14.5 13.5,7.056 13.541,7.015 12.896,6.37 10.37,6.37 8.5,4.5 8.5,0 0,0
+12V on Top Layer "+12V_L01_P014" (solid, pour order 14): 21.5,28 23.5,28 24.5,27 24.5,21.5 24,21 15.5,21 15.5,30.5 16.5,31.5 21,31.5 21.5,31
NetJ1_2 on Top Layer "NETJ1_2_L01_P011" (solid, pour order 11): 8.5,4.5 10.37,6.37 12.62,6.37 13.5,7.25 13.5,14.5 12.5,15.5 12.5,18 15,18 15,17 19,17 19,0 8.5,0
GND on Top Layer "GND_L01_P005" (solid, pour order 5): 5.9,54 11.5,54 11.5,47.5 7.9,47.5 5.9,49.5
GND on Top Layer "GND_L01_P004" (solid, pour order 4): 6,38.5 11.5,38.5 11.5,32 8,32 6,34
NetJ1_1 on Top Layer "NETJ1_1_L01_P010" (solid, pour order 10): 19,0 25.5,0 25.5,18.5 23,21 19,21
NetC7_2 on Top Layer "NETC7_2_L01_P003" (solid, pour order 3): 56,39 56,38 52,38 51,39 28,39 19.5,47.5 12.5,47.5 12.5,57.5 22,57.5 28,51.5 56,51.5
NetC7_1 on Top Layer "NETC7_1_L01_P001" (solid, pour order 1): 56,37 56,38 52,38 51,37 28,37 22,43 12.5,43 12.5,33 19.5,33 28,24.5 56,24.5
GND on Bottom Layer "GND_L02_P016" (solid, pour order 16): 0,0 0,35.5 13.5,22 13.5,0
+12V on Bottom Layer "+12V_L02_P013" (solid, pour order 13): 12,53.5 13,54.5 43.5,54.5 45,56 45,63.5 44.5,64 0,64 0,35.5 25,10.5 40.5,10.5 42,12 42,19.5 40.5,21 31.5,21 12,40.5

## Silkscreen, mask and mechanical layers (free items; w line width, h text height)
Top Overlay:
  drawing of 16 lines, arcs and shapes, not listed
  text "15V 6A" at 0.2,15.8 h1 r270
  text "STATION DE CHARGE / EMETTEUR 2022" at 38.5,2.5 h1.52
  text "0.22 x IALIM" at 23.2,0.7 h1